# EAGLE board LIN-MCP2021-v1a (EAGLE 5.03)
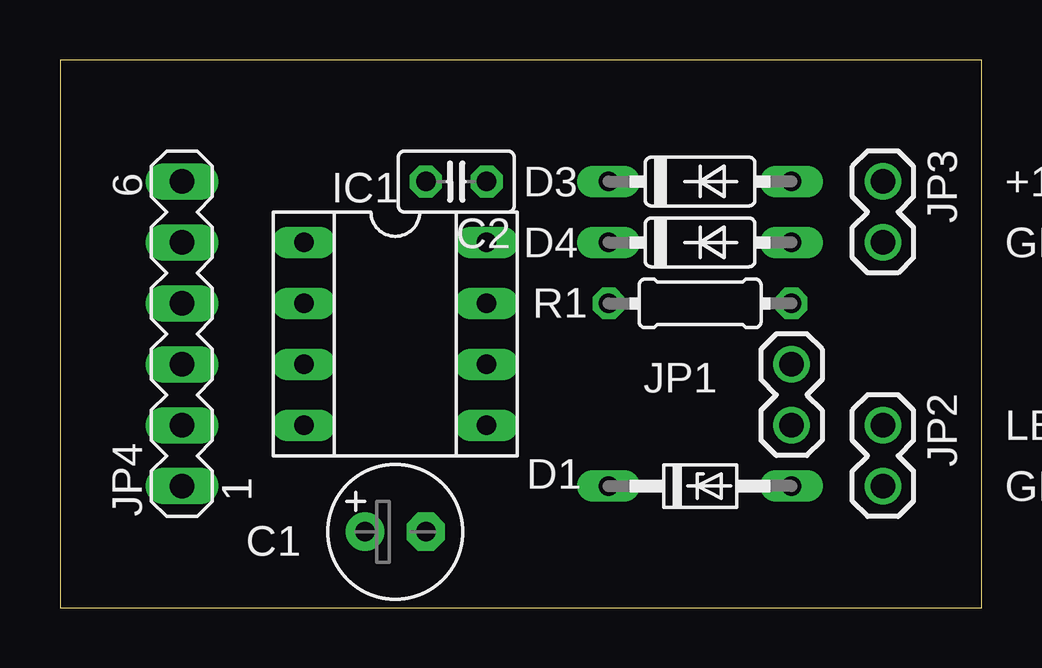
[diagram p0: board, top side]
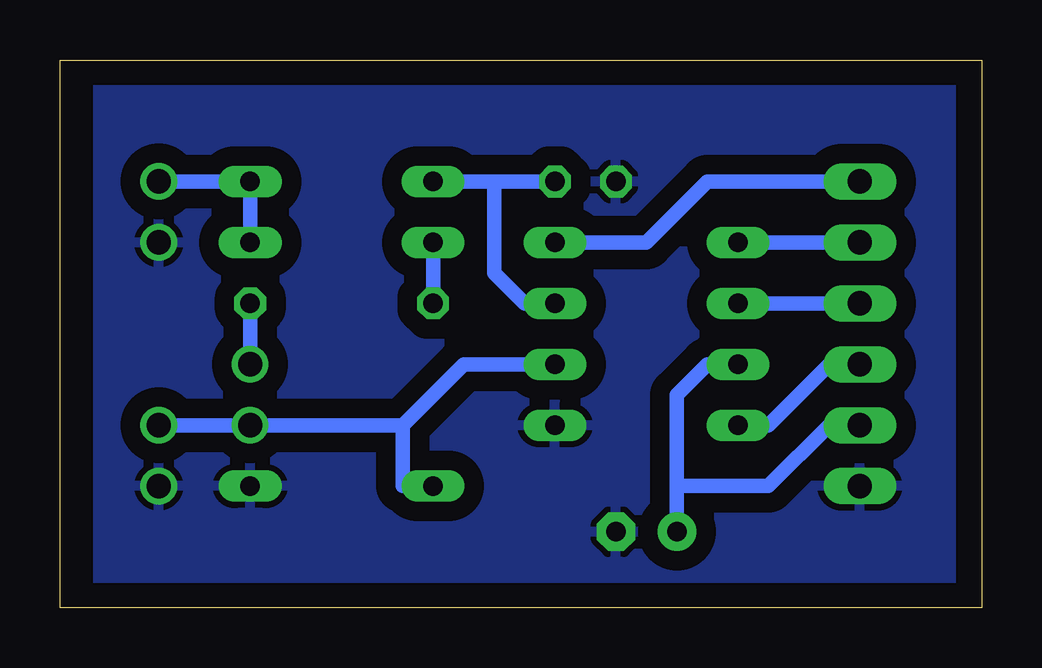
[diagram p1: board, bottom side, seen from below]

Size 38.4 x 22.85 mm. Coordinates in mm from the lower left corner, seen from the top.
Outline: 0,0 38.4,0 38.4,22.85 0,22.85 0,0
Copper layers (1*16): Top 0.035mm / dielectric 1.5mm / Bottom 0.035mm
Design rules "default": minimum track width 10mil, minimum drill 24mil, track to track 8mil, track to pad 8mil, pad to pad 8mil, via to via 8mil, smd to smd 8mil, copper to edge 40mil, drill to drill 8mil, minimum pad ring 10mil, minimum via ring 8mil, stop-mask expansion 4mil, vias tented up to drill 0mil, thermal gap 10mil

## Footprints (pad centres in the part's own frame; a part is rotated, then mirrored left to right if it is on the bottom)
E2,5-6 = drill 0.813 pad 1.6 round: + -1.27,0 | drill 0.813 pad 1.6 octagon: - 1.27,0
C025-025X050 = drill 0.813 octagon: 1 -1.27,0; 2 1.27,0
DO34Z7 = drill 0.813 long: A 3.81,0; C -3.81,0
DO35-7 = drill 0.813 long: A 3.81,0; C -3.81,0
SOCKET-08 = drill 0.813 long: 1 -3.81,-3.81; 2 -1.27,-3.81; 3 1.27,-3.81; 4 3.81,-3.81; 5 3.81,3.81; 6 1.27,3.81; 7 -1.27,3.81; 8 -3.81,3.81
1X02 = drill 1.016 round: 1 0,0; 2 2.54,0
MA06-1 = drill 1.016 long: 1 -6.35,0; 2 -3.81,0; 3 -1.27,0; 4 1.27,0; 5 3.81,0; 6 6.35,0
0204/7 = drill 0.813 octagon: 1 -3.81,0; 2 3.81,0

## Placement (x,y rotation side)
C1  10uF  [E2,5-6]  13.97,3.17 0 top
C2  0.1uF  [C025-025X050]  16.51,17.78 180 top
D1  27V Zener  [DO34Z7]  26.67,5.08 0 top
D3  1N4148  [DO35-7]  26.67,17.78 0 top
D4  1N4148  [DO35-7]  26.67,15.24 0 top
IC1  MCP2021  [SOCKET-08]  13.97,11.43 270 top
JP1  [1X02]  30.48,10.16 270 top
JP2  [1X02]  34.29,7.62 270 top
JP3  [1X02]  34.29,17.78 270 top
JP4  [MA06-1]  5.08,11.43 90 top
R1  1k  [0204/7]  26.67,12.7 0 top

## Library data of the parts
C1 C2 R1 = rcl
D1 D3 D4 = diode
IC1 = ic-package
JP1-JP3 = SparkFun
JP4 = con-lstb

## Nets
+12: C2.1 D3.C IC1.7
+12V: D3.A D4.A JP3.1
CS/LWAKE: IC1.2 JP4.4
FAULT/TXE: IC1.8 JP4.6
GND: C1.- C2.2 D1.A IC1.5 JP2.2 JP3.2 JP4.1
LBUS: D1.C IC1.6 JP1.2 JP2.1
N$1: JP1.1 R1.2
N$2: D4.C R1.1
RXD: IC1.1 JP4.5
TXD: IC1.4 JP4.3
VREG: C1.+ IC1.3 JP4.2

## Tracks (layer width: path | path; a pad name or v marks a point on that pad's centre or on a via)
+12
  Bottom 0.61: 21.59,17.78 20.32,17.78 20.32,13.97 19.05,12.7 IC1.7 | 21.59,17.78 C2.1 | 21.59,17.78 D3.C
+12V
  Bottom 0.61: D3.A D4.A D3.A | D3.A JP3.1
CS/LWAKE
  Bottom 0.61: JP4.4 IC1.2
FAULT/TXE
  Bottom 0.61: IC1.8 13.97,15.24 11.43,17.78 JP4.6
GND
  pour Bottom (isolate 0.813): 1.27,22.86 36.83,22.86 36.83,0 1.27,0
LBUS
  Bottom 0.61: IC1.6 21.59,10.16 24.13,7.62 | 24.13,7.62 JP1.2 | JP1.2 JP2.1 JP1.2 | D1.C 24.13,5.08 24.13,7.62
N$1
  Bottom 0.61: JP1.1 R1.2
N$2
  Bottom 0.61: R1.1 D4.C
RXD
  Bottom 0.61: JP4.5 IC1.1
TXD
  Bottom 0.61: JP4.3 6.35,10.16 8.89,7.62 IC1.4
VREG
  Bottom 0.61: 12.7,5.08 C1.+ | 12.7,5.08 12.7,8.89 11.43,10.16 IC1.3 | JP4.2 6.35,7.62 8.89,5.08 12.7,5.08

## Text on the board
tNames: TXE | +12V | RXD | GND | CS | TXD | VREG | LBUS | GND | GND